# Altium PCB DUTBoard_DEFAULT.PcbDoc (part 2 of 2)
Units mil, origin at the board's own origin, x right, y up, seen from the top; angles counter-clockwise.
Board outline 5475 x 5475 mil, 4 copper layers (Top Layer, Mid-Layer 1, Mid-Layer 2, Bottom Layer); 89 components, 471 nets, 1705 pads, 264 vias.
Unrouted connection lines stored in the file: 818.
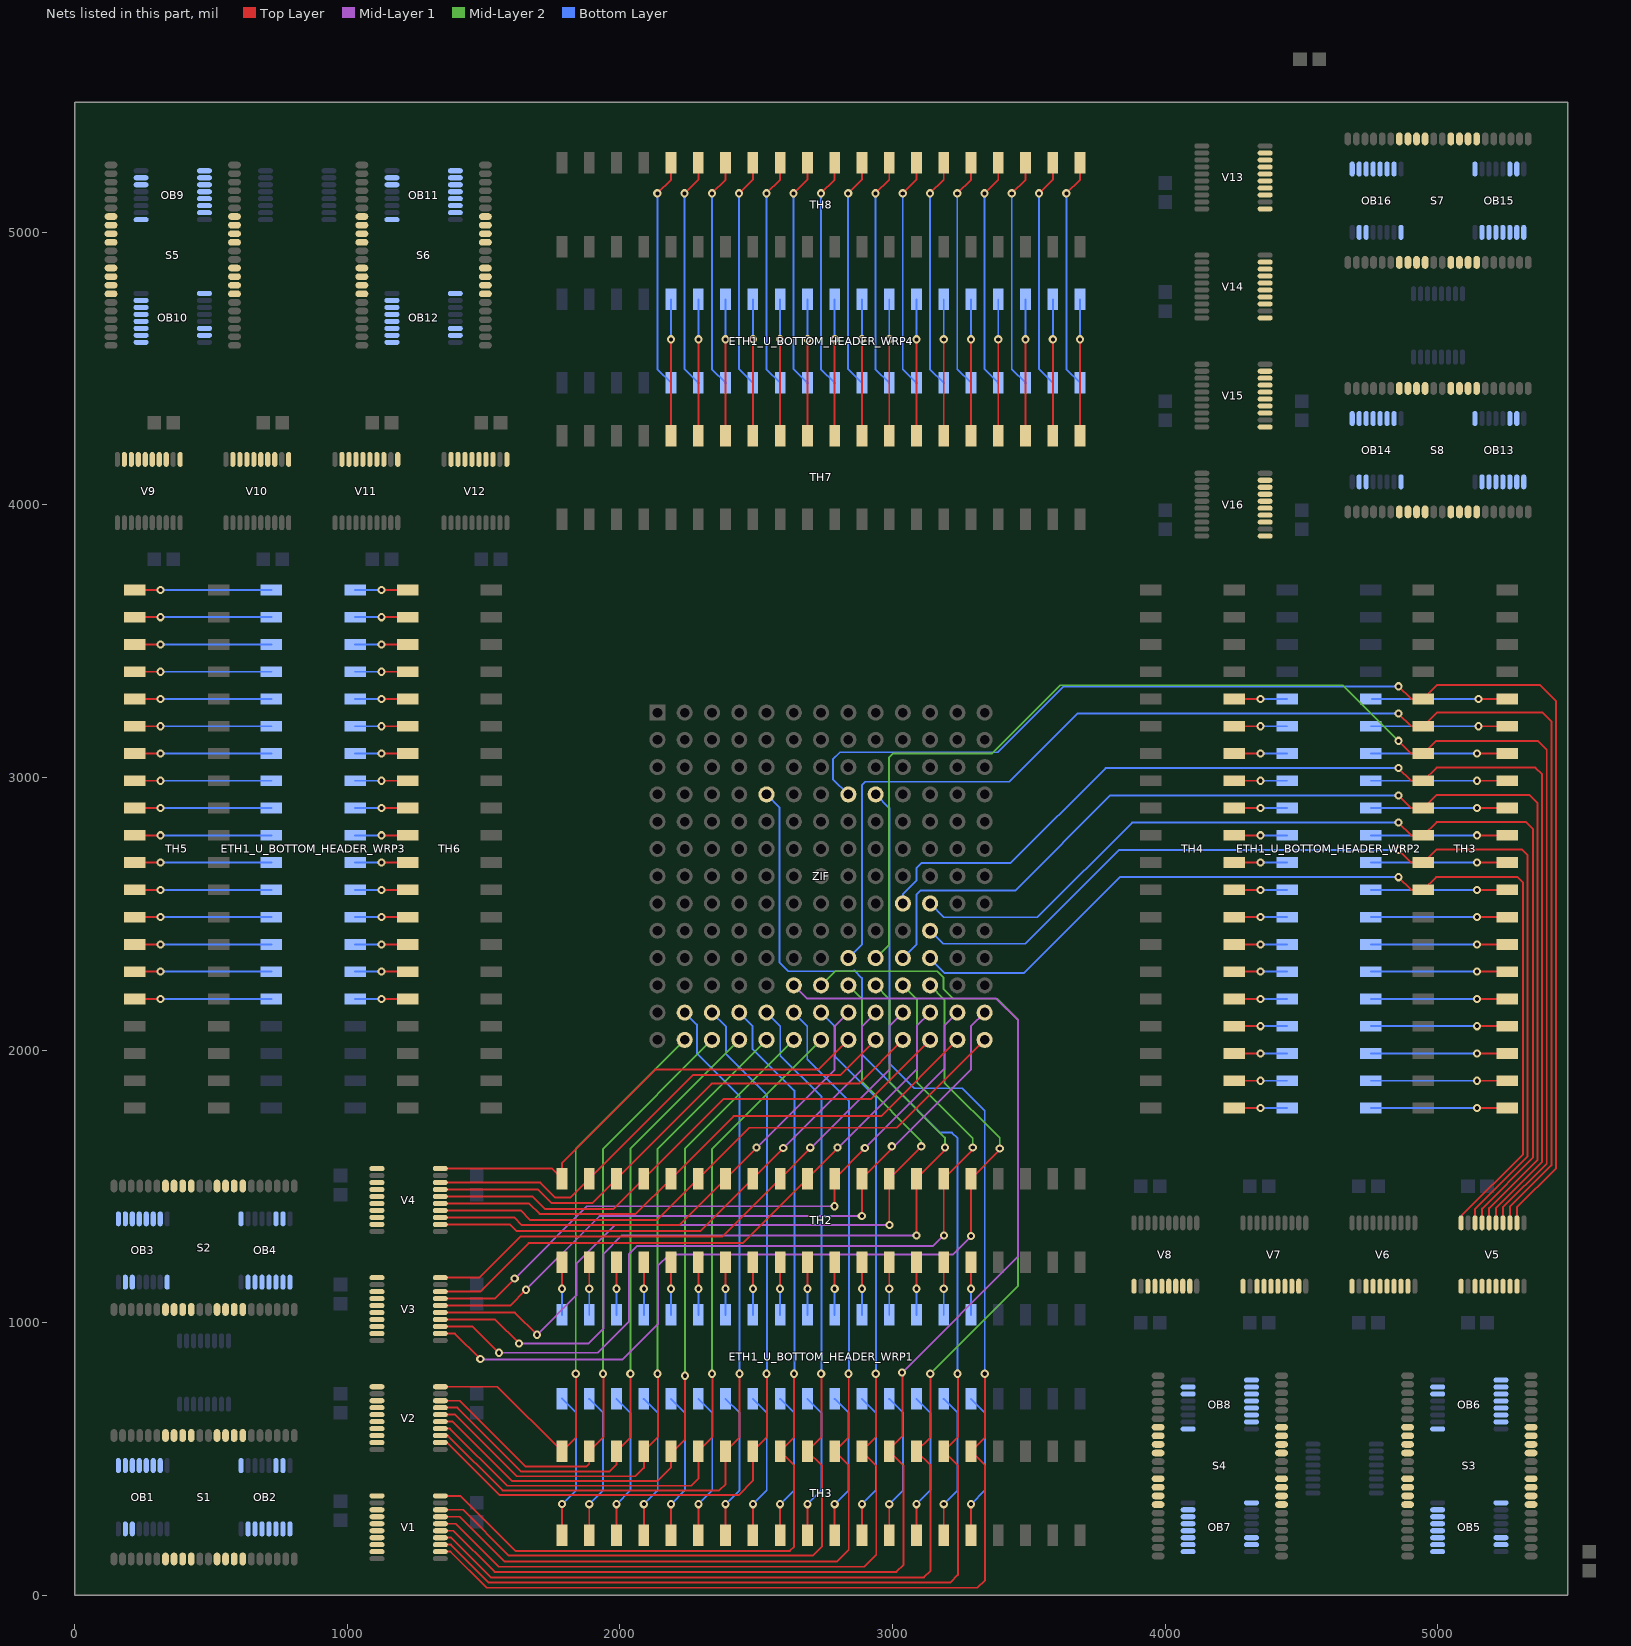
[diagram p4: the nets of this part, all layers, seen from the top]

## Via types
v1: diameter 30, hole 15, Top Layer to Bottom Layer, 264 vias

## Nets (pads, with @x,y where several pads share a name; then routed paths per layer and width w, separated by ;. In a path a pad name is that pad's centre, name@x,y a point inside that pad or via, vN(x,y) a via of type N, cw(c..) or ccw(c..) an arc to the next point about the centre after c; other vN are vias at no path point) (continued)
INSIDE_B88: TH3.32@4946.46,2587.5 V5.IVCC0 ZIF.89 | length 3732.4
  Top Layer w7: v1(4855,2634) 4901.5,2587.5 TH3.32@4946.46,2587.5 4992.96,2634 5292,2634 5312,2614 5312,1618.23 5087.58,1393.82 5087.58,1368.88 V5.IVCC0@5084.84,1366.14
  Bottom Layer w7: ZIF.89@3137.5,2337.5 3137.5,2335.5 3190,2283 3482,2283 3833,2634 v1(4855,2634)
INSIDE_B89: TH3.31@4946.46,2687.5 V5.IVCC1 ZIF.90 | length 3830.5
  Top Layer w7: v1(4855,2734) 4901.5,2687.5 TH3.31@4946.46,2687.5 4994.96,2736 5308,2736 5329,2715 5329,1610.08 5136.02,1417.11 V5.IVCC1@5136.02,1366.14
  Bottom Layer w7: ZIF.90@3137.5,2437.5 3185,2390 3487,2390 3831,2734 v1(4855,2734)
INSIDE_B90: TH3.30@4946.46,2787.5 V5.IVCC2 ZIF.91 | length 3946.9
  Top Layer w7: v1(4855,2834) 4901.5,2787.5 TH3.30@4946.46,2787.5 4994.96,2836 5323,2836 5348,2811 5348,1605.04 5161.61,1418.66 V5.IVCC2@5161.61,1366.14
  Bottom Layer w7: ZIF.91@3137.5,2537.5 3188,2487 3531,2487 3878,2834 v1(4855,2834)
INSIDE_B91: TH3.29@4946.46,2887.5 V5.IVCC3 ZIF.92 | length 4346.2
  Top Layer w7: v1(4855,2934) 4901.5,2887.5 TH3.29@4946.46,2887.5 4993.96,2935 5336,2935 5365,2906 5365,1598 5187.2,1420.2 V5.IVCC3@5187.2,1366.14
  Bottom Layer w7: ZIF.92@3037.5,2337.5 3087,2387 3087,2570 3102,2585 3450,2585 3799,2934 v1(4855,2934)
INSIDE_B92: TH3.28@4946.46,2987.5 V5.IVCC4 ZIF.93 | length 4361.7
  Top Layer w7: v1(4855,3034) 4901.5,2987.5 TH3.28@4946.46,2987.5 4994.96,3036 5357,3036 5382,3011 5382,1590.96 5212.8,1421.75 V5.IVCC4@5212.8,1366.14
  Bottom Layer w7: ZIF.93@3037.5,2537.5 3037.5,2571.5 3087,2621 3087,2667 3106,2686 3433,2686 3781,3034 v1(4855,3034)
INSIDE_B93: TH3.27@4946.46,3087.5 V5.IVCC5 ZIF.94 | length 5215.8
  Top Layer w7: v1(4855,3134) 4901.5,3087.5 TH3.27@4946.46,3087.5 4992.96,3134 5366,3134 5399,3101 5399,1583.92 5238.39,1423.3 V5.IVCC5@5238.39,1366.14
  Mid-Layer 2 w7: ZIF.94@2937.5,2337.5 2987,2387 2987,3073 3001,3087 3363,3087 3614,3338 4651,3338 v1(4855,3134)
INSIDE_B94: TH3.26@4946.46,3187.5 V5.IVCC6 ZIF.95 | length 5247.6
  Top Layer w7: v1(4855,3234) 4901.5,3187.5 TH3.26@4946.46,3187.5 4996.96,3238 5383,3238 5416,3205 5416,1576.88 5264,1424.88 V5.IVCC6@5264,1366.17
  Bottom Layer w7: ZIF.95@2837.5,2337.5 2887,2387 2887,2971 2900,2984 3427,2984 3677,3234 v1(4855,3234)
INSIDE_B95: TH3.25@4946.46,3287.5 V5.IVCC7 ZIF.96 | length 4952.6
  Top Layer w7: v1(4855,3334) 4901.5,3287.5 TH3.25@4946.46,3287.5 4997.96,3339 5373,3339 5433,3279 5433,1567 5289.57,1423.57 V5.IVCC7@5289.57,1366.14
  Bottom Layer w7: ZIF.96@2837.5,2937.5 2781,2994 2781,3066 2807,3092 3386,3092 3628,3334 v1(4855,3334)
INSIDE_B96: TH2.40 V4.IVCC0 ZIF.97 | length 1756.3
  Top Layer w7: V4.IVCC0@1341.14,1565.16 1750.89,1565.16 TH2.40@1787.5,1528.54 1787.5,1586.5 2129,1928 2728,1928 ZIF.97@2837.5,2037.5
INSIDE_B97: TH2.39 V4.IVCC1 ZIF.98 | length 1858.8
  Top Layer w7: V4.IVCC1@1341.14,1513.98 1708.02,1513.98 1763,1459 1817.96,1459 TH2.39@1887.5,1528.54 2266.96,1908 2808,1908 ZIF.98@2937.5,2037.5
INSIDE_B98: TH2.38 V4.IVCC2 ZIF.99 | length 1964.7
  Top Layer w7: V4.IVCC2@1341.14,1488.39 1699.61,1488.39 1749,1439 1897.96,1439 TH2.38@1987.5,1528.54 2335.96,1877 2877,1877 ZIF.99@3037.5,2037.5
INSIDE_B99: TH2.37 V4.IVCC3 ZIF.100 | length 2072.3
  Top Layer w7: V4.IVCC3@1341.14,1462.8 1680.2,1462.8 1726,1417 1975.96,1417 TH2.37@2087.5,1528.54 2379.96,1821 2921,1821 ZIF.100@3137.5,2037.5
INSIDE_B100: TH2.36 V4.IVCC4 ZIF.101 | length 2176.7
  Top Layer w7: V4.IVCC4@1341.14,1437.2 1666.8,1437.2 1705,1399 2057.96,1399 TH2.36@2187.5,1528.54 2416.96,1758 2958,1758 ZIF.101@3237.5,2037.5
INSIDE_B101: TH2.35 V4.IVCC5 ZIF.102 | length 2284.3
  Top Layer w7: V4.IVCC5@1341.14,1411.61 1635.39,1411.61 1670,1377 2135.96,1377 TH2.35@2287.5,1528.54 2473.96,1715 3015,1715 ZIF.102@3337.5,2037.5
INSIDE_B102: TH2.34 V4.IVCC6 ZIF.103 | length 1927
  Top Layer w7: V4.IVCC6@1341.14,1386.02 1611.98,1386.02 1640,1358 2216.96,1358 TH2.34@2387.5,1528.54 v1(2501,1642.04) v1@2504.04,1642.04
  Mid-Layer 1 w7: v1(2501,1642.04) 2787,1928.04 2787,2087 ZIF.103@2837.5,2137.5
INSIDE_B103: TH2.33 V4.IVCC7 ZIF.104 | length 2032.1
  Top Layer w7: V4.IVCC7@1341.14,1360.43 1596.57,1360.43 1621,1336 2294.96,1336 TH2.33@2487.5,1528.54 2599,1640.04 v1(2599,1641)
  Mid-Layer 1 w7: v1(2599,1641) 2599.96,1641 2888,1929.04 2888,2088 ZIF.104@2937.5,2137.5
INSIDE_B104: TH2.32 V3.IVCC0 ZIF.105 | length 2194
  Top Layer w7: V3.IVCC0@1341.14,1165.16 1484.16,1165.16 1635,1316 2374.96,1316 TH2.32@2587.5,1528.54 2698,1639.04 v1(2698,1642)
  Mid-Layer 1 w7: v1(2698,1642) 2700.96,1642 2989,1930.04 2989,2089 ZIF.105@3037.5,2137.5
INSIDE_B105: TH2.31 V3.IVCC1 ZIF.106 | length 2315.7
  Top Layer w7: V3.IVCC1@1341.14,1113.98 1486.98,1113.98 1665,1292 2450.96,1292 TH2.31@2687.5,1528.54 2798,1639.04 v1(2798,1643)
  Mid-Layer 1 w7: v1(2798,1643) 2801.96,1643 3089,1930.04 3089,2089 ZIF.106@3137.5,2137.5
INSIDE_B106: TH2.30 V3.IVCC2 ZIF.107 | length 2483.7
  Top Layer w7: V3.IVCC2@1341.14,1088.39 1540.39,1088.39 v1(1614,1162) ; v1@2787.5,1427.5 TH2.30@2787.5,1528.54 2898,1639.04 v1(2898,1641)
  Mid-Layer 1 w7: v1(1614,1162) 1879,1427 v1(2787,1427) ; v1(2898,1641) 2899.96,1641 3190,1931.04 3190,2090 ZIF.107@3237.5,2137.5
INSIDE_B107: TH2.29 V3.IVCC3 ZIF.108 | length 2620.2
  Top Layer w7: V3.IVCC3@1341.14,1062.8 1596.8,1062.8 v1(1655,1121) ; v1(2887,1391) 2887.5,1391.5 TH2.29@2887.5,1528.54 2997,1638.04 v1(2997,1647)
  Mid-Layer 1 w7: v1(1655,1121) 1925,1391 v1(2887,1391) ; v1(2997,1647) 3005.96,1647 3287,1928.04 3287,2087 ZIF.108@3337.5,2137.5
INSIDE_B108: TH2.28 V3.IVCC4 ZIF.109 | length 2954.7
  Top Layer w7: V3.IVCC4@1341.14,1037.2 1614.8,1037.2 v1(1696,956) ; v1(2988,1358) 2987.5,1358.5 TH2.28@2987.5,1528.54 3105,1646.04 v1(3105,1647)
  Mid-Layer 1 w7: v1(1696,956) 1840,1100 1840,1217 1981,1358 v1(2988,1358)
  Mid-Layer 2 w7: ZIF.109@2837.5,2237.5 2888,2187 2888,1882.96 3105,1665.96 v1(3105,1647)
INSIDE_B109: TH2.27 V3.IVCC5 ZIF.110 | length 3174.1
  Top Layer w7: V3.IVCC5@1341.14,1011.61 1542.39,1011.61 v1(1630,924) ; v1(3088,1320) 3087.5,1320.5 TH2.27@3087.5,1528.54 3192,1633.04 v1(3192,1643)
  Mid-Layer 1 w7: v1(1630,924) 1885,924 1939,978 1939,1252 2007,1320 v1(3088,1320)
  Mid-Layer 2 w7: ZIF.110@2937.5,2237.5 2988,2187 2988,1882.96 3192,1678.96 v1(3192,1643)
INSIDE_B110: TH2.26 V3.IVCC6 ZIF.111 | length 3277.8
  Top Layer w7: V3.IVCC6@1341.14,986.02 1459.98,986.02 v1(1556,890) ; v1(3188,1320) 3187.5,1320.5 TH2.26@3187.5,1528.54 3294,1635.04 v1(3294,1643)
  Mid-Layer 1 w7: v1(1556,890) 1919,890 2033,1004 2033,1252 2063,1282 3149,1282 v1@3187.5,1320.5
  Mid-Layer 2 w7: ZIF.111@3037.5,2237.5 3089,2186 3089,1881.96 3294,1676.96 v1(3294,1643)
INSIDE_B111: TH2.25 V3.IVCC7 ZIF.112 | length 3368.2
  Top Layer w7: V3.IVCC7@1341.14,960.43 1394.57,960.43 v1(1488,867) ; v1(3288,1318) 3287.5,1318.5 TH2.25@3287.5,1528.54 3393,1634.04 v1(3393,1639.02)
  Mid-Layer 1 w7: v1(1488,867) 1489.5,865.5 2009.5,865.5 2139,995 2139,1209 2180,1250 3220,1250 v1(3288,1318)
  Mid-Layer 2 w7: ZIF.112@3137.5,2237.5 3190,2185 3190,1880.96 3393,1677.96 v1(3393,1639.02)
INSIDE_B112: TH3.40@1787.5,528.54 V2.IVCC0 ZIF.113 | length 2241.1
  Top Layer w7: V2.IVCC0@1341.14,765.16 1550.89,765.16 TH3.40@1787.5,528.54 1839,580.04 v1@1839,814
  Mid-Layer 2 w7: v1(1838,813) 1838,1638 ZIF.113@2237.5,2037.5
INSIDE_B113: TH3.39@1887.5,528.54 V2.IVCC1 ZIF.114 | length 2393.2
  Top Layer w7: V2.IVCC1@1341.14,713.98 1412.02,713.98 1654,472 1876,472 1887.5,483.5 TH3.39@1887.5,528.54 1939,580.04 v1@1939,814
  Mid-Layer 2 w7: v1(1938,813) 1938,1638 ZIF.114@2337.5,2037.5
INSIDE_B114: TH3.38@1987.5,528.54 V2.IVCC2 ZIF.115 | length 2498.4
  Top Layer w7: V2.IVCC2@1341.14,688.39 1403.61,688.39 1637,455 1962,455 1987.5,480.5 TH3.38@1987.5,528.54 2039,580.04 v1@2039,814
  Mid-Layer 2 w7: v1(2038,813) 2038,1638 ZIF.115@2437.5,2037.5
INSIDE_B115: TH3.37@2087.5,528.54 V2.IVCC3 ZIF.116 | length 2610.3
  Top Layer w7: V2.IVCC3@1341.14,662.8 1395.2,662.8 1621,437 2057,437 2087.5,467.5 TH3.37@2087.5,528.54 2139,580.04 v1@2139,814
  Mid-Layer 2 w7: v1(2138,813) 2138,1638 ZIF.116@2537.5,2037.5
INSIDE_B116: TH3.36@2187.5,528.54 V2.IVCC4 ZIF.117 | length 2720.4
  Top Layer w7: V2.IVCC4@1341.14,637.2 1386.8,637.2 1605,419 2136,419 2187.5,470.5 TH3.36@2187.5,528.54 ; TH3.36@2187.5,521 2239,572.5 v1@2239,806.46
  Mid-Layer 2 w7: v1(2238,805.46) 2238,1638 ZIF.117@2637.5,2037.5
INSIDE_B117: TH3.35@2287.5,528.54 V2.IVCC5 ZIF.118 | length 2841
  Top Layer w7: V2.IVCC5@1341.14,611.61 1376.39,611.61 1586,402 2261,402 2287.5,428.5 TH3.35@2287.5,528.54 2339,580.04 v1@2339,814
  Mid-Layer 2 w7: v1(2338,813) 2338,1638 ZIF.118@2737.5,2037.5
INSIDE_B118: TH3.34@2387.5,528.54 V2.IVCC6 ZIF.119 | length 2973.7
  Top Layer w7: V2.IVCC6@1341.14,586.02 1368.98,586.02 1570,385 2364,385 2387.5,408.5 TH3.34@2387.5,528.54 2439,580.04 v1@2439,814
  Bottom Layer w7: ZIF.119@2237.5,2137.5 2282,2093 2282,1988 2438,1832 v1(2438,813)
INSIDE_B119: TH3.33@2487.5,528.54 V2.IVCC7 ZIF.120 | length 3071.4
  Top Layer w7: V2.IVCC7@1341.14,560.43 1366.57,560.43 1559,368 2435,368 2487.5,420.5 TH3.33@2487.5,528.54 2539,580.04 v1@2539,814
  Bottom Layer w7: ZIF.120@2337.5,2137.5 2389,2086 2389,1985 2539.46,1834.54 2539.46,814.46 v1(2538,813)
INSIDE_B120: TH3.32@2587.5,528.54 V1.IVCC0 ZIF.121 | length 3474.6
  Top Layer w7: V1.IVCC0@1341.14,365.16 1413.84,365.16 1616,163 2623,163 2639,179 2639,477.04 TH3.32@2587.5,528.54 2639,580.04 v1@2639,814
  Bottom Layer w7: ZIF.121@2437.5,2137.5 2486,2089 2486,2005 2639.46,1851.54 2639.46,814.46 v1(2638,813)
INSIDE_B121: TH3.31@2687.5,528.54 V1.IVCC1 ZIF.122 | length 3569.8
  Top Layer w7: V1.IVCC1@1341.14,313.98 1425.02,313.98 1593,146 2707,146 2741,180 2741,475.04 TH3.31@2687.5,528.54 2739,580.04 v1@2739,814
  Bottom Layer w7: ZIF.122@2537.5,2137.5 2588,2087 2588,1980 2739.46,1828.54 2739.46,814.46 v1(2738,813)
INSIDE_B122: TH3.30@2787.5,528.54 V1.IVCC2 ZIF.123 | length 3681.6
  Top Layer w7: V1.IVCC2@1341.14,288.39 1412.61,288.39 1577,124 2795,124 2839,168 2839,477.04 TH3.30@2787.5,528.54 2839,580.04 v1@2839,814
  Bottom Layer w7: ZIF.123@2637.5,2137.5 2687,2088 2687,1966 2839.46,1813.54 2839.46,814.46 v1(2838,813)
INSIDE_B123: TH3.29@2887.5,528.54 V1.IVCC3 ZIF.124 | length 3799.3
  Top Layer w7: V1.IVCC3@1341.14,262.8 1397.2,262.8 1555,105 2896,105 2940,149 2940,476.04 TH3.29@2887.5,528.54 2939,580.04 v1@2939,814
  Bottom Layer w7: ZIF.124@2737.5,2137.5 2789,2086 2789,1976 2939.46,1825.54 2939.46,814.46 v1(2938,813)
INSIDE_B124: TH3.28@2987.5,528.54 V1.IVCC4 ZIF.125 | length 4860.9
  Top Layer w7: V1.IVCC4@1341.14,237.2 1388.8,237.2 1540,86 3014,86 3040,112 3040,476.04 TH3.28@2987.5,528.54 ; TH3.28@2984,533 3035.5,584.5 v1@3035.5,818.46
  Mid-Layer 1 w7: ZIF.125@2637.5,2237.5 2686,2189 3380,2189 3460,2109 3460,1242.96 v1(3034.5,817.46)
INSIDE_B125: TH3.27@3087.5,528.54 V1.IVCC5 ZIF.126 | length 4908.9
  Top Layer w7: V1.IVCC5@1341.14,211.61 1381.39,211.61 1527,66 3115,66 3139,90 3139,477.04 TH3.27@3087.5,528.54 3139,580.04 v1@3139,814
  Mid-Layer 2 w7: ZIF.126@2737.5,2237.5 2789,2289 3164,2289 3186,2267 3186,2224 3222,2188 3383,2188 3460,2111 3460,1135 v1(3138,813)
INSIDE_B126: TH3.26@3187.5,528.54 V1.IVCC6 ZIF.127 | length 5334
  Top Layer w7: V1.IVCC6@1341.14,186.02 1379.98,186.02 1519,47 3211,47 3239,75 3239,477.04 TH3.26@3187.5,528.54 3239,580.04 v1@3239,814
  Bottom Layer w7: ZIF.127@2537.5,2937.5 2585,2890 2585,2322 2618,2289 2856,2289 2859,2292 2887,2264 2887,1984 3174,1697 3217,1697 3238,1676 v1(3238,813)
INSIDE_B127: TH3.25@3287.5,528.54 V1.IVCC7 ZIF.128 | length 5258.5
  Top Layer w7: V1.IVCC7@1341.14,160.43 1378.57,160.43 1511,28 3311,28 3339,56 3339,477.04 TH3.25@3287.5,528.54 3339,580.04 v1@3339,814
  Bottom Layer w7: ZIF.128@2937.5,2937.5 2988,2887 2988,1951 3079,1860 3255,1860 3338,1777 v1(3338,813)
NetOB1_U_OB_WRP16_DS: OB16.DS
OB_D_B0: OB16.D0 S7.DATA0 V14.OVL0
OB_D_B1: OB16.D1 S7.DATA1 V14.OVL1
OB_D_B2: OB16.D2 S7.DATA2 V14.OVL2
OB_D_B3: OB16.D3 S7.DATA3 V14.OVL3
OB_D_B4: OB16.D4 S7.DATA4 V14.OVL4
OB_D_B5: OB16.D5 S7.DATA5 V14.OVL5
OB_D_B6: OB16.D6 S7.DATA6 V14.OVL6
OB_D_B7: OB16.D7 S7.DATA7 V14.OVL7
OB_D_B8: OB15.D0 S7.DATA8 V13.OVL0
OB_D_B9: OB15.D1 S7.DATA9 V13.OVL1
OB_D_B10: OB15.D2 S7.DATA10 V13.OVL2
OB_D_B11: OB15.D3 S7.DATA11 V13.OVL3
OB_D_B12: OB15.D4 S7.DATA12 V13.OVL4
OB_D_B13: OB15.D5 S7.DATA13 V13.OVL5
OB_D_B14: OB15.D6 S7.DATA14 V13.OVL6
OB_D_B15: OB15.D7 S7.DATA15 V13.OVL7
OB_D_B16: OB14.D0 S8.DATA0 V16.OVL0
OB_D_B17: OB14.D1 S8.DATA1 V16.OVL1
OB_D_B18: OB14.D2 S8.DATA2 V16.OVL2
OB_D_B19: OB14.D3 S8.DATA3 V16.OVL3
OB_D_B20: OB14.D4 S8.DATA4 V16.OVL4
OB_D_B21: OB14.D5 S8.DATA5 V16.OVL5
OB_D_B22: OB14.D6 S8.DATA6 V16.OVL6
OB_D_B23: OB14.D7 S8.DATA7 V16.OVL7
OB_D_B24: OB13.D0 S8.DATA8 V15.OVL0
OB_D_B25: OB13.D1 S8.DATA9 V15.OVL1
OB_D_B26: OB13.D2 S8.DATA10 V15.OVL2
OB_D_B27: OB13.D3 S8.DATA11 V15.OVL3
OB_D_B28: OB13.D4 S8.DATA12 V15.OVL4
OB_D_B29: OB13.D5 S8.DATA13 V15.OVL5
OB_D_B30: OB13.D6 S8.DATA14 V15.OVL6
OB_D_B31: OB13.D7 S8.DATA15 V15.OVL7
OB_D_B32: OB12.D0 S6.DATA0 V12.OVL0
OB_D_B33: OB12.D1 S6.DATA1 V12.OVL1
OB_D_B34: OB12.D2 S6.DATA2 V12.OVL2
OB_D_B35: OB12.D3 S6.DATA3 V12.OVL3
OB_D_B36: OB12.D4 S6.DATA4 V12.OVL4
OB_D_B37: OB12.D5 S6.DATA5 V12.OVL5
OB_D_B38: OB12.D6 S6.DATA6 V12.OVL6
OB_D_B39: OB12.D7 S6.DATA7 V12.OVL7
OB_D_B40: OB11.D0 S6.DATA8 V11.OVL0
OB_D_B41: OB11.D1 S6.DATA9 V11.OVL1
OB_D_B42: OB11.D2 S6.DATA10 V11.OVL2
OB_D_B43: OB11.D3 S6.DATA11 V11.OVL3
OB_D_B44: OB11.D4 S6.DATA12 V11.OVL4
OB_D_B45: OB11.D5 S6.DATA13 V11.OVL5
OB_D_B46: OB11.D6 S6.DATA14 V11.OVL6
OB_D_B47: OB11.D7 S6.DATA15 V11.OVL7
OB_D_B48: OB10.D0 S5.DATA0 V10.OVL0
OB_D_B49: OB10.D1 S5.DATA1 V10.OVL1
OB_D_B50: OB10.D2 S5.DATA2 V10.OVL2
OB_D_B51: OB10.D3 S5.DATA3 V10.OVL3
OB_D_B52: OB10.D4 S5.DATA4 V10.OVL4
OB_D_B53: OB10.D5 S5.DATA5 V10.OVL5
OB_D_B54: OB10.D6 S5.DATA6 V10.OVL6
OB_D_B55: OB10.D7 S5.DATA7 V10.OVL7
OB_D_B56: OB9.D0 S5.DATA8 V9.OVL0
OB_D_B57: OB9.D1 S5.DATA9 V9.OVL1
OB_D_B58: OB9.D2 S5.DATA10 V9.OVL2
OB_D_B59: OB9.D3 S5.DATA11 V9.OVL3
OB_D_B60: OB9.D4 S5.DATA12 V9.OVL4
OB_D_B61: OB9.D5 S5.DATA13 V9.OVL5
OB_D_B62: OB9.D6 S5.DATA14 V9.OVL6
OB_D_B63: OB9.D7 S5.DATA15 V9.OVL7
OB_D_B64: OB8.D0 S4.DATA0 V8.OVL0
OB_D_B65: OB8.D1 S4.DATA1 V8.OVL1
OB_D_B66: OB8.D2 S4.DATA2 V8.OVL2
OB_D_B67: OB8.D3 S4.DATA3 V8.OVL3
OB_D_B68: OB8.D4 S4.DATA4 V8.OVL4
OB_D_B69: OB8.D5 S4.DATA5 V8.OVL5
OB_D_B70: OB8.D6 S4.DATA6 V8.OVL6
OB_D_B71: OB8.D7 S4.DATA7 V8.OVL7
OB_D_B72: OB7.D0 S4.DATA8 V7.OVL0
OB_D_B73: OB7.D1 S4.DATA9 V7.OVL1
OB_D_B74: OB7.D2 S4.DATA10 V7.OVL2
OB_D_B75: OB7.D3 S4.DATA11 V7.OVL3
OB_D_B76: OB7.D4 S4.DATA12 V7.OVL4
OB_D_B77: OB7.D5 S4.DATA13 V7.OVL5
OB_D_B78: OB7.D6 S4.DATA14 V7.OVL6
OB_D_B79: OB7.D7 S4.DATA15 V7.OVL7
OB_D_B80: OB6.D0 S3.DATA0 V6.OVL0
OB_D_B81: OB6.D1 S3.DATA1 V6.OVL1
OB_D_B82: OB6.D2 S3.DATA2 V6.OVL2
OB_D_B83: OB6.D3 S3.DATA3 V6.OVL3
OB_D_B84: OB6.D4 S3.DATA4 V6.OVL4
OB_D_B85: OB6.D5 S3.DATA5 V6.OVL5
OB_D_B86: OB6.D6 S3.DATA6 V6.OVL6
OB_D_B87: OB6.D7 S3.DATA7 V6.OVL7
OB_D_B88: OB5.D0 S3.DATA8 V5.OVL0
OB_D_B89: OB5.D1 S3.DATA9 V5.OVL1
OB_D_B90: OB5.D2 S3.DATA10 V5.OVL2
OB_D_B91: OB5.D3 S3.DATA11 V5.OVL3
OB_D_B92: OB5.D4 S3.DATA12 V5.OVL4
OB_D_B93: OB5.D5 S3.DATA13 V5.OVL5
OB_D_B94: OB5.D6 S3.DATA14 V5.OVL6
OB_D_B95: OB5.D7 S3.DATA15 V5.OVL7
OB_D_B96: OB4.D0 S2.DATA0 V4.OVL0
OB_D_B97: OB4.D1 S2.DATA1 V4.OVL1
OB_D_B98: OB4.D2 S2.DATA2 V4.OVL2
OB_D_B99: OB4.D3 S2.DATA3 V4.OVL3
OB_D_B100: OB4.D4 S2.DATA4 V4.OVL4
OB_D_B101: OB4.D5 S2.DATA5 V4.OVL5
OB_D_B102: OB4.D6 S2.DATA6 V4.OVL6
OB_D_B103: OB4.D7 S2.DATA7 V4.OVL7
OB_D_B104: OB3.D0 S2.DATA8 V3.OVL0
OB_D_B105: OB3.D1 S2.DATA9 V3.OVL1
OB_D_B106: OB3.D2 S2.DATA10 V3.OVL2
OB_D_B107: OB3.D3 S2.DATA11 V3.OVL3
OB_D_B108: OB3.D4 S2.DATA12 V3.OVL4
OB_D_B109: OB3.D5 S2.DATA13 V3.OVL5
OB_D_B110: OB3.D6 S2.DATA14 V3.OVL6
OB_D_B111: OB3.D7 S2.DATA15 V3.OVL7
OB_D_B112: OB2.D0 S1.DATA0 V2.OVL0
OB_D_B113: OB2.D1 S1.DATA1 V2.OVL1
OB_D_B114: OB2.D2 S1.DATA2 V2.OVL2
OB_D_B115: OB2.D3 S1.DATA3 V2.OVL3
OB_D_B116: OB2.D4 S1.DATA4 V2.OVL4
OB_D_B117: OB2.D5 S1.DATA5 V2.OVL5
OB_D_B118: OB2.D6 S1.DATA6 V2.OVL6
OB_D_B119: OB2.D7 S1.DATA7 V2.OVL7
OB_D_B120: OB1.D0 S1.DATA8 V1.OVL0
OB_D_B121: OB1.D1 S1.DATA9 V1.OVL1
OB_D_B122: OB1.D2 S1.DATA10 V1.OVL2
OB_D_B123: OB1.D3 S1.DATA11 V1.OVL3
OB_D_B124: OB1.D4 S1.DATA12 V1.OVL4
OB_D_B125: OB1.D5 S1.DATA13 V1.OVL5
OB_D_B126: OB1.D6 S1.DATA14 V1.OVL6
OB_D_B127: OB1.D7 S1.DATA15 V1.OVL7
OUTSIDE_L_W0_U_BOTTOM_HEADER_WRP1: ETH1_U_BOTTOM_HEADER_WRP1.1 TH2.1 | length 192.9
  Top Layer w7: v1(1787.5,1124.5) TH2.1@1787.5,1221.46
  Bottom Layer w7: ETH1_U_BOTTOM_HEADER_WRP1.1@1787.5,1028.54 v1(1787.5,1124.5)
OUTSIDE_L_W0_U_BOTTOM_HEADER_WRP2: ETH1_U_BOTTOM_HEADER_WRP2.1 TH4.1 | length 192.9
  Top Layer w7: TH4.1@4253.54,1787.5 v1(4349.5,1787.5)
  Bottom Layer w7: v1(4349.5,1787.5) ETH1_U_BOTTOM_HEADER_WRP2.1@4446.46,1787.5
OUTSIDE_L_W0_U_BOTTOM_HEADER_WRP3: ETH1_U_BOTTOM_HEADER_WRP3.1 TH6.1 | length 193.6
  Top Layer w7: v1@1125,3688 v1(1125.5,3687.5) TH6.1@1221.46,3687.5
  Bottom Layer w7: ETH1_U_BOTTOM_HEADER_WRP3.1@1028.54,3687.5 v1(1125.5,3687.5)
OUTSIDE_L_W0_U_BOTTOM_HEADER_WRP4: ETH1_U_BOTTOM_HEADER_WRP4.1 TH8.1 | length 848.9
  Top Layer w7: v1(3637,5142) 3687.5,5192.5 TH8.1@3687.5,5253.54
  Bottom Layer w7: v1(3637,5142) 3637,4496.96 ETH1_U_BOTTOM_HEADER_WRP4.1@3687.5,4446.46
OUTSIDE_L_W1_U_BOTTOM_HEADER_WRP1: ETH1_U_BOTTOM_HEADER_WRP1.2 TH2.2 | length 192.9
  Top Layer w7: v1(1887.5,1124.5) TH2.2@1887.5,1221.46
  Bottom Layer w7: ETH1_U_BOTTOM_HEADER_WRP1.2@1887.5,1028.54 v1(1887.5,1124.5)
OUTSIDE_L_W1_U_BOTTOM_HEADER_WRP2: ETH1_U_BOTTOM_HEADER_WRP2.2 TH4.2 | length 192.9
  Top Layer w7: TH4.2@4253.54,1887.5 v1(4349.5,1887.5)
  Bottom Layer w7: v1(4349.5,1887.5) ETH1_U_BOTTOM_HEADER_WRP2.2@4446.46,1887.5
OUTSIDE_L_W1_U_BOTTOM_HEADER_WRP3: ETH1_U_BOTTOM_HEADER_WRP3.2 TH6.2 | length 192.9
  Top Layer w7: v1(1125.5,3587.5) TH6.2@1221.46,3587.5
  Bottom Layer w7: ETH1_U_BOTTOM_HEADER_WRP3.2@1028.54,3587.5 v1(1125.5,3587.5)
OUTSIDE_L_W1_U_BOTTOM_HEADER_WRP4: ETH1_U_BOTTOM_HEADER_WRP4.2 TH8.2 | length 848.9
  Top Layer w7: v1(3537,5142) 3587.5,5192.5 TH8.2@3587.5,5253.54
  Bottom Layer w7: v1(3537,5142) 3537,4496.96 ETH1_U_BOTTOM_HEADER_WRP4.2@3587.5,4446.46
OUTSIDE_L_W2_U_BOTTOM_HEADER_WRP1: ETH1_U_BOTTOM_HEADER_WRP1.3 TH2.3 | length 192.9
  Top Layer w7: v1(1987.5,1124.5) TH2.3@1987.5,1221.46
  Bottom Layer w7: ETH1_U_BOTTOM_HEADER_WRP1.3@1987.5,1028.54 v1(1987.5,1124.5)
OUTSIDE_L_W2_U_BOTTOM_HEADER_WRP2: ETH1_U_BOTTOM_HEADER_WRP2.3 TH4.3 | length 192.9
  Top Layer w7: TH4.3@4253.54,1987.5 v1(4349.5,1987.5)
  Bottom Layer w7: v1(4349.5,1987.5) ETH1_U_BOTTOM_HEADER_WRP2.3@4446.46,1987.5
OUTSIDE_L_W2_U_BOTTOM_HEADER_WRP3: ETH1_U_BOTTOM_HEADER_WRP3.3 TH6.3 | length 192.9
  Top Layer w7: v1(1125.5,3487.5) TH6.3@1221.46,3487.5
  Bottom Layer w7: ETH1_U_BOTTOM_HEADER_WRP3.3@1028.54,3487.5 v1(1125.5,3487.5)
OUTSIDE_L_W2_U_BOTTOM_HEADER_WRP4: ETH1_U_BOTTOM_HEADER_WRP4.3 TH8.3 | length 848.9
  Top Layer w7: v1(3437,5142) 3487.5,5192.5 TH8.3@3487.5,5253.54
  Bottom Layer w7: v1(3437,5142) 3437,4496.96 ETH1_U_BOTTOM_HEADER_WRP4.3@3487.5,4446.46
OUTSIDE_L_W3_U_BOTTOM_HEADER_WRP1: ETH1_U_BOTTOM_HEADER_WRP1.4 TH2.4 | length 192.9
  Top Layer w7: v1(2087.5,1124.5) TH2.4@2087.5,1221.46
  Bottom Layer w7: ETH1_U_BOTTOM_HEADER_WRP1.4@2087.5,1028.54 v1(2087.5,1124.5)
OUTSIDE_L_W3_U_BOTTOM_HEADER_WRP2: ETH1_U_BOTTOM_HEADER_WRP2.4 TH4.4 | length 192.9
  Top Layer w7: TH4.4@4253.54,2087.5 v1(4349.5,2087.5)
  Bottom Layer w7: v1(4349.5,2087.5) ETH1_U_BOTTOM_HEADER_WRP2.4@4446.46,2087.5
OUTSIDE_L_W3_U_BOTTOM_HEADER_WRP3: ETH1_U_BOTTOM_HEADER_WRP3.4 TH6.4 | length 192.9
  Top Layer w7: v1(1125.5,3387.5) TH6.4@1221.46,3387.5
  Bottom Layer w7: ETH1_U_BOTTOM_HEADER_WRP3.4@1028.54,3387.5 v1(1125.5,3387.5)
OUTSIDE_L_W3_U_BOTTOM_HEADER_WRP4: ETH1_U_BOTTOM_HEADER_WRP4.4 TH8.4 | length 848.9
  Top Layer w7: v1(3337,5142) 3387.5,5192.5 TH8.4@3387.5,5253.54
  Bottom Layer w7: v1(3337,5142) 3337,4496.96 ETH1_U_BOTTOM_HEADER_WRP4.4@3387.5,4446.46
OUTSIDE_L_W4_U_BOTTOM_HEADER_WRP1: ETH1_U_BOTTOM_HEADER_WRP1.5 TH2.5 | length 192.9
  Top Layer w7: v1(2187.5,1124.5) TH2.5@2187.5,1221.46
  Bottom Layer w7: ETH1_U_BOTTOM_HEADER_WRP1.5@2187.5,1028.54 v1(2187.5,1124.5)
OUTSIDE_L_W4_U_BOTTOM_HEADER_WRP2: ETH1_U_BOTTOM_HEADER_WRP2.5 TH4.5 | length 192.9
  Top Layer w7: TH4.5@4253.54,2187.5 v1(4349.5,2187.5)
  Bottom Layer w7: v1(4349.5,2187.5) ETH1_U_BOTTOM_HEADER_WRP2.5@4446.46,2187.5
OUTSIDE_L_W4_U_BOTTOM_HEADER_WRP3: ETH1_U_BOTTOM_HEADER_WRP3.5 TH6.5 | length 192.9
  Top Layer w7: v1(1125.5,3287.5) TH6.5@1221.46,3287.5
  Bottom Layer w7: ETH1_U_BOTTOM_HEADER_WRP3.5@1028.54,3287.5 v1(1125.5,3287.5)
OUTSIDE_L_W4_U_BOTTOM_HEADER_WRP4: ETH1_U_BOTTOM_HEADER_WRP4.5 TH8.5 | length 848.9
  Top Layer w7: v1(3237,5142) 3287.5,5192.5 TH8.5@3287.5,5253.54
  Bottom Layer w7: v1(3237,5142) 3237,4496.96 ETH1_U_BOTTOM_HEADER_WRP4.5@3287.5,4446.46
OUTSIDE_L_W5_U_BOTTOM_HEADER_WRP1: ETH1_U_BOTTOM_HEADER_WRP1.6 TH2.6 | length 192.9
  Top Layer w7: v1(2287.5,1124.5) TH2.6@2287.5,1221.46
  Bottom Layer w7: ETH1_U_BOTTOM_HEADER_WRP1.6@2287.5,1028.54 v1(2287.5,1124.5)
OUTSIDE_L_W5_U_BOTTOM_HEADER_WRP2: ETH1_U_BOTTOM_HEADER_WRP2.6 TH4.6 | length 192.9
  Top Layer w7: TH4.6@4253.54,2287.5 v1(4349.5,2287.5)
  Bottom Layer w7: v1(4349.5,2287.5) ETH1_U_BOTTOM_HEADER_WRP2.6@4446.46,2287.5
OUTSIDE_L_W5_U_BOTTOM_HEADER_WRP3: ETH1_U_BOTTOM_HEADER_WRP3.6 TH6.6 | length 192.9
  Top Layer w7: v1(1125.5,3187.5) TH6.6@1221.46,3187.5
  Bottom Layer w7: ETH1_U_BOTTOM_HEADER_WRP3.6@1028.54,3187.5 v1(1125.5,3187.5)
OUTSIDE_L_W5_U_BOTTOM_HEADER_WRP4: ETH1_U_BOTTOM_HEADER_WRP4.6 TH8.6 | length 848.9
  Top Layer w7: v1(3137,5142) 3187.5,5192.5 TH8.6@3187.5,5253.54
  Bottom Layer w7: v1(3137,5142) 3137,4496.96 ETH1_U_BOTTOM_HEADER_WRP4.6@3187.5,4446.46
OUTSIDE_L_W6_U_BOTTOM_HEADER_WRP1: ETH1_U_BOTTOM_HEADER_WRP1.7 TH2.7 | length 192.9
  Top Layer w7: v1(2387.5,1124.5) TH2.7@2387.5,1221.46
  Bottom Layer w7: ETH1_U_BOTTOM_HEADER_WRP1.7@2387.5,1028.54 v1(2387.5,1124.5)
OUTSIDE_L_W6_U_BOTTOM_HEADER_WRP2: ETH1_U_BOTTOM_HEADER_WRP2.7 TH4.7 | length 192.9
  Top Layer w7: TH4.7@4253.54,2387.5 v1(4349.5,2387.5)
  Bottom Layer w7: v1(4349.5,2387.5) ETH1_U_BOTTOM_HEADER_WRP2.7@4446.46,2387.5
OUTSIDE_L_W6_U_BOTTOM_HEADER_WRP3: ETH1_U_BOTTOM_HEADER_WRP3.7 TH6.7 | length 192.9
  Top Layer w7: v1(1125.5,3087.5) TH6.7@1221.46,3087.5
  Bottom Layer w7: ETH1_U_BOTTOM_HEADER_WRP3.7@1028.54,3087.5 v1(1125.5,3087.5)
OUTSIDE_L_W6_U_BOTTOM_HEADER_WRP4: ETH1_U_BOTTOM_HEADER_WRP4.7 TH8.7 | length 848.9
  Top Layer w7: v1(3037,5142) 3087.5,5192.5 TH8.7@3087.5,5253.54
  Bottom Layer w7: v1(3037,5142) 3037,4496.96 ETH1_U_BOTTOM_HEADER_WRP4.7@3087.5,4446.46
OUTSIDE_L_W7_U_BOTTOM_HEADER_WRP1: ETH1_U_BOTTOM_HEADER_WRP1.8 TH2.8 | length 192.9
  Top Layer w7: v1(2487.5,1124.5) TH2.8@2487.5,1221.46
  Bottom Layer w7: ETH1_U_BOTTOM_HEADER_WRP1.8@2487.5,1028.54 v1(2487.5,1124.5)
OUTSIDE_L_W7_U_BOTTOM_HEADER_WRP2: ETH1_U_BOTTOM_HEADER_WRP2.8 TH4.8 | length 192.9
  Top Layer w7: TH4.8@4253.54,2487.5 v1(4349.5,2487.5)
  Bottom Layer w7: v1(4349.5,2487.5) ETH1_U_BOTTOM_HEADER_WRP2.8@4446.46,2487.5
OUTSIDE_L_W7_U_BOTTOM_HEADER_WRP3: ETH1_U_BOTTOM_HEADER_WRP3.8 TH6.8 | length 192.9
  Top Layer w7: v1(1125.5,2987.5) TH6.8@1221.46,2987.5
  Bottom Layer w7: ETH1_U_BOTTOM_HEADER_WRP3.8@1028.54,2987.5 v1(1125.5,2987.5)
OUTSIDE_L_W7_U_BOTTOM_HEADER_WRP4: ETH1_U_BOTTOM_HEADER_WRP4.8 TH8.8 | length 848.9
  Top Layer w7: v1(2937,5142) 2987.5,5192.5 TH8.8@2987.5,5253.54
  Bottom Layer w7: v1(2937,5142) 2937,4496.96 ETH1_U_BOTTOM_HEADER_WRP4.8@2987.5,4446.46
OUTSIDE_L_W8_U_BOTTOM_HEADER_WRP1: ETH1_U_BOTTOM_HEADER_WRP1.9 TH2.9 | length 192.9
  Top Layer w7: v1(2587.5,1124.5) TH2.9@2587.5,1221.46
  Bottom Layer w7: ETH1_U_BOTTOM_HEADER_WRP1.9@2587.5,1028.54 v1(2587.5,1124.5)
OUTSIDE_L_W8_U_BOTTOM_HEADER_WRP2: ETH1_U_BOTTOM_HEADER_WRP2.9 TH4.9 | length 192.9
  Top Layer w7: TH4.9@4253.54,2587.5 v1(4349.5,2587.5)
  Bottom Layer w7: v1(4349.5,2587.5) ETH1_U_BOTTOM_HEADER_WRP2.9@4446.46,2587.5
OUTSIDE_L_W8_U_BOTTOM_HEADER_WRP3: ETH1_U_BOTTOM_HEADER_WRP3.9 TH6.9 | length 192.9
  Top Layer w7: v1(1125.5,2887.5) TH6.9@1221.46,2887.5
  Bottom Layer w7: ETH1_U_BOTTOM_HEADER_WRP3.9@1028.54,2887.5 v1(1125.5,2887.5)
OUTSIDE_L_W8_U_BOTTOM_HEADER_WRP4: ETH1_U_BOTTOM_HEADER_WRP4.9 TH8.9 | length 848.9
  Top Layer w7: v1(2837,5142) 2887.5,5192.5 TH8.9@2887.5,5253.54
  Bottom Layer w7: v1(2837,5142) 2837,4496.96 ETH1_U_BOTTOM_HEADER_WRP4.9@2887.5,4446.46
OUTSIDE_L_W9_U_BOTTOM_HEADER_WRP1: ETH1_U_BOTTOM_HEADER_WRP1.10 TH2.10 | length 192.9
  Top Layer w7: v1(2687.5,1124.5) TH2.10@2687.5,1221.46
  Bottom Layer w7: ETH1_U_BOTTOM_HEADER_WRP1.10@2687.5,1028.54 v1(2687.5,1124.5)
OUTSIDE_L_W9_U_BOTTOM_HEADER_WRP2: ETH1_U_BOTTOM_HEADER_WRP2.10 TH4.10 | length 192.9
  Top Layer w7: TH4.10@4253.54,2687.5 v1(4349.5,2687.5)
  Bottom Layer w7: v1(4349.5,2687.5) ETH1_U_BOTTOM_HEADER_WRP2.10@4446.46,2687.5
OUTSIDE_L_W9_U_BOTTOM_HEADER_WRP3: ETH1_U_BOTTOM_HEADER_WRP3.10 TH6.10 | length 192.9
  Top Layer w7: v1(1125.5,2787.5) TH6.10@1221.46,2787.5
  Bottom Layer w7: ETH1_U_BOTTOM_HEADER_WRP3.10@1028.54,2787.5 v1(1125.5,2787.5)
OUTSIDE_L_W9_U_BOTTOM_HEADER_WRP4: ETH1_U_BOTTOM_HEADER_WRP4.10 TH8.10 | length 848.9
  Top Layer w7: v1(2737,5142) 2787.5,5192.5 TH8.10@2787.5,5253.54
  Bottom Layer w7: v1(2737,5142) 2737,4496.96 ETH1_U_BOTTOM_HEADER_WRP4.10@2787.5,4446.46
OUTSIDE_L_W10_U_BOTTOM_HEADER_WRP1: ETH1_U_BOTTOM_HEADER_WRP1.11 TH2.11 | length 192.9
  Top Layer w7: v1(2787.5,1124.5) TH2.11@2787.5,1221.46
  Bottom Layer w7: ETH1_U_BOTTOM_HEADER_WRP1.11@2787.5,1028.54 v1(2787.5,1124.5)
OUTSIDE_L_W10_U_BOTTOM_HEADER_WRP2: ETH1_U_BOTTOM_HEADER_WRP2.11 TH4.11 | length 192.9
  Top Layer w7: TH4.11@4253.54,2787.5 v1(4349.5,2787.5)
  Bottom Layer w7: v1(4349.5,2787.5) ETH1_U_BOTTOM_HEADER_WRP2.11@4446.46,2787.5
OUTSIDE_L_W10_U_BOTTOM_HEADER_WRP3: ETH1_U_BOTTOM_HEADER_WRP3.11 TH6.11 | length 192.9
  Top Layer w7: v1(1125.5,2687.5) TH6.11@1221.46,2687.5
  Bottom Layer w7: ETH1_U_BOTTOM_HEADER_WRP3.11@1028.54,2687.5 v1(1125.5,2687.5)
OUTSIDE_L_W10_U_BOTTOM_HEADER_WRP4: ETH1_U_BOTTOM_HEADER_WRP4.11 TH8.11 | length 848.9
  Top Layer w7: v1(2637,5142) 2687.5,5192.5 TH8.11@2687.5,5253.54
  Bottom Layer w7: v1(2637,5142) 2637,4496.96 ETH1_U_BOTTOM_HEADER_WRP4.11@2687.5,4446.46
OUTSIDE_L_W11_U_BOTTOM_HEADER_WRP1: ETH1_U_BOTTOM_HEADER_WRP1.12 TH2.12 | length 192.9
  Top Layer w7: v1(2887.5,1124.5) TH2.12@2887.5,1221.46
  Bottom Layer w7: ETH1_U_BOTTOM_HEADER_WRP1.12@2887.5,1028.54 v1(2887.5,1124.5)
OUTSIDE_L_W11_U_BOTTOM_HEADER_WRP2: ETH1_U_BOTTOM_HEADER_WRP2.12 TH4.12 | length 192.9
  Top Layer w7: TH4.12@4253.54,2887.5 v1(4349.5,2887.5)
  Bottom Layer w7: v1(4349.5,2887.5) ETH1_U_BOTTOM_HEADER_WRP2.12@4446.46,2887.5
OUTSIDE_L_W11_U_BOTTOM_HEADER_WRP3: ETH1_U_BOTTOM_HEADER_WRP3.12 TH6.12 | length 192.9
  Top Layer w7: v1(1125.5,2587.5) TH6.12@1221.46,2587.5
  Bottom Layer w7: ETH1_U_BOTTOM_HEADER_WRP3.12@1028.54,2587.5 v1(1125.5,2587.5)
OUTSIDE_L_W11_U_BOTTOM_HEADER_WRP4: ETH1_U_BOTTOM_HEADER_WRP4.12 TH8.12 | length 848.9
  Top Layer w7: v1(2537,5142) 2587.5,5192.5 TH8.12@2587.5,5253.54
  Bottom Layer w7: v1(2537,5142) 2537,4496.96 ETH1_U_BOTTOM_HEADER_WRP4.12@2587.5,4446.46
OUTSIDE_L_W12_U_BOTTOM_HEADER_WRP1: ETH1_U_BOTTOM_HEADER_WRP1.13 TH2.13 | length 192.9
  Top Layer w7: v1(2987.5,1124.5) TH2.13@2987.5,1221.46
  Bottom Layer w7: ETH1_U_BOTTOM_HEADER_WRP1.13@2987.5,1028.54 v1(2987.5,1124.5)
OUTSIDE_L_W12_U_BOTTOM_HEADER_WRP2: ETH1_U_BOTTOM_HEADER_WRP2.13 TH4.13 | length 192.9
  Top Layer w7: TH4.13@4253.54,2987.5 v1(4349.5,2987.5)
  Bottom Layer w7: v1(4349.5,2987.5) ETH1_U_BOTTOM_HEADER_WRP2.13@4446.46,2987.5
OUTSIDE_L_W12_U_BOTTOM_HEADER_WRP3: ETH1_U_BOTTOM_HEADER_WRP3.13 TH6.13 | length 192.9
  Top Layer w7: v1(1125.5,2487.5) TH6.13@1221.46,2487.5
  Bottom Layer w7: ETH1_U_BOTTOM_HEADER_WRP3.13@1028.54,2487.5 v1(1125.5,2487.5)
OUTSIDE_L_W12_U_BOTTOM_HEADER_WRP4: ETH1_U_BOTTOM_HEADER_WRP4.13 TH8.13 | length 848.9
  Top Layer w7: v1(2437,5142) 2487.5,5192.5 TH8.13@2487.5,5253.54
  Bottom Layer w7: v1(2437,5142) 2437,4496.96 ETH1_U_BOTTOM_HEADER_WRP4.13@2487.5,4446.46
OUTSIDE_L_W13_U_BOTTOM_HEADER_WRP1: ETH1_U_BOTTOM_HEADER_WRP1.14 TH2.14 | length 192.9
  Top Layer w7: v1(3087.5,1124.5) TH2.14@3087.5,1221.46
  Bottom Layer w7: ETH1_U_BOTTOM_HEADER_WRP1.14@3087.5,1028.54 v1(3087.5,1124.5)
OUTSIDE_L_W13_U_BOTTOM_HEADER_WRP2: ETH1_U_BOTTOM_HEADER_WRP2.14 TH4.14 | length 192.9
  Top Layer w7: TH4.14@4253.54,3087.5 v1(4349.5,3087.5)
  Bottom Layer w7: v1(4349.5,3087.5) ETH1_U_BOTTOM_HEADER_WRP2.14@4446.46,3087.5
OUTSIDE_L_W13_U_BOTTOM_HEADER_WRP3: ETH1_U_BOTTOM_HEADER_WRP3.14 TH6.14 | length 192.9
  Top Layer w7: v1(1125.5,2387.5) TH6.14@1221.46,2387.5
  Bottom Layer w7: ETH1_U_BOTTOM_HEADER_WRP3.14@1028.54,2387.5 v1(1125.5,2387.5)
OUTSIDE_L_W13_U_BOTTOM_HEADER_WRP4: ETH1_U_BOTTOM_HEADER_WRP4.14 TH8.14 | length 848.9
  Top Layer w7: v1(2337,5142) 2387.5,5192.5 TH8.14@2387.5,5253.54
  Bottom Layer w7: v1(2337,5142) 2337,4496.96 ETH1_U_BOTTOM_HEADER_WRP4.14@2387.5,4446.46
OUTSIDE_L_W14_U_BOTTOM_HEADER_WRP1: ETH1_U_BOTTOM_HEADER_WRP1.15 TH2.15 | length 192.9
  Top Layer w7: v1(3187.5,1124.5) TH2.15@3187.5,1221.46
  Bottom Layer w7: ETH1_U_BOTTOM_HEADER_WRP1.15@3187.5,1028.54 v1(3187.5,1124.5)
OUTSIDE_L_W14_U_BOTTOM_HEADER_WRP2: ETH1_U_BOTTOM_HEADER_WRP2.15 TH4.15 | length 192.9
  Top Layer w7: TH4.15@4253.54,3187.5 v1(4349.5,3187.5)
  Bottom Layer w7: v1(4349.5,3187.5) ETH1_U_BOTTOM_HEADER_WRP2.15@4446.46,3187.5
OUTSIDE_L_W14_U_BOTTOM_HEADER_WRP3: ETH1_U_BOTTOM_HEADER_WRP3.15 TH6.15 | length 192.9
  Top Layer w7: v1(1125.5,2287.5) TH6.15@1221.46,2287.5
  Bottom Layer w7: ETH1_U_BOTTOM_HEADER_WRP3.15@1028.54,2287.5 v1(1125.5,2287.5)
OUTSIDE_L_W14_U_BOTTOM_HEADER_WRP4: ETH1_U_BOTTOM_HEADER_WRP4.15 TH8.15 | length 848.9
  Top Layer w7: v1(2237,5142) 2287.5,5192.5 TH8.15@2287.5,5253.54
  Bottom Layer w7: v1(2237,5142) 2237,4496.96 ETH1_U_BOTTOM_HEADER_WRP4.15@2287.5,4446.46
OUTSIDE_L_W15_U_BOTTOM_HEADER_WRP1: ETH1_U_BOTTOM_HEADER_WRP1.16 TH2.16 | length 192.9
  Top Layer w7: v1(3287.5,1124.5) TH2.16@3287.5,1221.46
  Bottom Layer w7: ETH1_U_BOTTOM_HEADER_WRP1.16@3287.5,1028.54 v1(3287.5,1124.5)
OUTSIDE_L_W15_U_BOTTOM_HEADER_WRP2: ETH1_U_BOTTOM_HEADER_WRP2.16 TH4.16 | length 192.9
  Top Layer w7: TH4.16@4253.54,3287.5 v1(4349.5,3287.5)
  Bottom Layer w7: v1(4349.5,3287.5) ETH1_U_BOTTOM_HEADER_WRP2.16@4446.46,3287.5
OUTSIDE_L_W15_U_BOTTOM_HEADER_WRP3: ETH1_U_BOTTOM_HEADER_WRP3.16 TH6.16 | length 192.9
  Top Layer w7: v1(1125.5,2187.5) TH6.16@1221.46,2187.5
  Bottom Layer w7: ETH1_U_BOTTOM_HEADER_WRP3.16@1028.54,2187.5 v1(1125.5,2187.5)
OUTSIDE_L_W15_U_BOTTOM_HEADER_WRP4: ETH1_U_BOTTOM_HEADER_WRP4.16 TH8.16 | length 848.9
  Top Layer w7: v1(2137,5142) 2187.5,5192.5 TH8.16@2187.5,5253.54
  Bottom Layer w7: v1(2137,5142) 2137,4496.96 ETH1_U_BOTTOM_HEADER_WRP4.16@2187.5,4446.46
OUTSIDE_R_W0_U_BOTTOM_HEADER_WRP1: ETH1_U_BOTTOM_HEADER_WRP1.40 TH3.1@1787.5,221.46 | length 542.7
  Top Layer w7: TH3.1@1787.5,221.46 1788,221.96 v1(1788,335)
  Bottom Layer w7: ETH1_U_BOTTOM_HEADER_WRP1.40@1787.5,721.46 1839,669.96 1839,386 v1(1788,335)
OUTSIDE_R_W0_U_BOTTOM_HEADER_WRP2: ETH1_U_BOTTOM_HEADER_WRP2.40 TH3.1@5253.54,1787.5 | length 503.5
  Top Layer w7: v1(5143.5,1787.5) TH3.1@5253.54,1787.5
  Bottom Layer w7: ETH1_U_BOTTOM_HEADER_WRP2.40@4753.54,1787.5 v1(5143.5,1787.5) v1@5146,1785
OUTSIDE_R_W0_U_BOTTOM_HEADER_WRP3: ETH1_U_BOTTOM_HEADER_WRP3.40 TH5.1 | length 500
  Top Layer w7: TH5.1@221.46,3687.5 v1(315,3687.5)
  Bottom Layer w7: v1(315,3687.5) ETH1_U_BOTTOM_HEADER_WRP3.40@721.46,3687.5
OUTSIDE_R_W0_U_BOTTOM_HEADER_WRP4: ETH1_U_BOTTOM_HEADER_WRP4.40 TH7.1 | length 500
  Top Layer w7: TH7.1@3687.5,4253.54 v1(3687.5,4606.5)
  Bottom Layer w7: v1(3687.5,4606.5) ETH1_U_BOTTOM_HEADER_WRP4.40@3687.5,4753.54
OUTSIDE_R_W1_U_BOTTOM_HEADER_WRP1: ETH1_U_BOTTOM_HEADER_WRP1.39 TH3.2@1887.5,221.46 | length 542.7
  Top Layer w7: TH3.2@1887,220.96 TH3.2@1887.5,221.46 v1(1887.5,334.5)
  Bottom Layer w7: ETH1_U_BOTTOM_HEADER_WRP1.39@1887,720.96 1938.5,669.46 1938.5,385.5 v1(1887.5,334.5)
OUTSIDE_R_W1_U_BOTTOM_HEADER_WRP2: ETH1_U_BOTTOM_HEADER_WRP2.39 TH3.2@5253.54,1887.5 | length 503.5
  Top Layer w7: v1(5143.5,1887.5) TH3.2@5253.54,1887.5
  Bottom Layer w7: ETH1_U_BOTTOM_HEADER_WRP2.39@4753.54,1887.5 v1(5143.5,1887.5) v1@5146,1885
OUTSIDE_R_W1_U_BOTTOM_HEADER_WRP3: ETH1_U_BOTTOM_HEADER_WRP3.39 TH5.2 | length 500
  Top Layer w7: TH5.2@221.46,3587.5 v1(315,3587.5)
  Bottom Layer w7: v1(315,3587.5) ETH1_U_BOTTOM_HEADER_WRP3.39@721.46,3587.5
OUTSIDE_R_W1_U_BOTTOM_HEADER_WRP4: ETH1_U_BOTTOM_HEADER_WRP4.39 TH7.2 | length 500
  Top Layer w7: TH7.2@3587.5,4253.54 v1(3587.5,4606.5)
  Bottom Layer w7: v1(3587.5,4606.5) ETH1_U_BOTTOM_HEADER_WRP4.39@3587.5,4753.54
OUTSIDE_R_W2_U_BOTTOM_HEADER_WRP1: ETH1_U_BOTTOM_HEADER_WRP1.38 TH3.3@1987.5,221.46 | length 542.7
  Top Layer w7: TH3.3@1987,220.96 TH3.3@1987.5,221.46 v1(1987.5,334.5)
  Bottom Layer w7: ETH1_U_BOTTOM_HEADER_WRP1.38@1987,720.96 2038.5,669.46 2038.5,385.5 v1(1987.5,334.5)
OUTSIDE_R_W2_U_BOTTOM_HEADER_WRP2: ETH1_U_BOTTOM_HEADER_WRP2.38 TH3.3@5253.54,1987.5 | length 503.5
  Top Layer w7: v1(5143.5,1987.5) TH3.3@5253.54,1987.5
  Bottom Layer w7: ETH1_U_BOTTOM_HEADER_WRP2.38@4753.54,1987.5 v1(5143.5,1987.5) v1@5146,1985
OUTSIDE_R_W2_U_BOTTOM_HEADER_WRP3: ETH1_U_BOTTOM_HEADER_WRP3.38 TH5.3 | length 500
  Top Layer w7: TH5.3@221.46,3487.5 v1(315,3487.5)
  Bottom Layer w7: v1(315,3487.5) ETH1_U_BOTTOM_HEADER_WRP3.38@721.46,3487.5
OUTSIDE_R_W2_U_BOTTOM_HEADER_WRP4: ETH1_U_BOTTOM_HEADER_WRP4.38 TH7.3 | length 500
  Top Layer w7: TH7.3@3487.5,4253.54 v1(3487.5,4606.5)
  Bottom Layer w7: v1(3487.5,4606.5) ETH1_U_BOTTOM_HEADER_WRP4.38@3487.5,4753.54
OUTSIDE_R_W3_U_BOTTOM_HEADER_WRP1: ETH1_U_BOTTOM_HEADER_WRP1.37 TH3.4@2087.5,221.46 | length 542.7
  Top Layer w7: TH3.4@2087,220.96 TH3.4@2087.5,221.46 v1(2087.5,334.5)
  Bottom Layer w7: ETH1_U_BOTTOM_HEADER_WRP1.37@2087,720.96 2138.5,669.46 2138.5,385.5 v1(2087.5,334.5)
OUTSIDE_R_W3_U_BOTTOM_HEADER_WRP2: ETH1_U_BOTTOM_HEADER_WRP2.37 TH3.4@5253.54,2087.5 | length 503.5
  Top Layer w7: v1(5143.5,2087.5) TH3.4@5253.54,2087.5
  Bottom Layer w7: ETH1_U_BOTTOM_HEADER_WRP2.37@4753.54,2087.5 v1(5143.5,2087.5) v1@5146,2085
OUTSIDE_R_W3_U_BOTTOM_HEADER_WRP3: ETH1_U_BOTTOM_HEADER_WRP3.37 TH5.4 | length 500
  Top Layer w7: TH5.4@221.46,3387.5 v1(315,3387.5)
  Bottom Layer w7: v1(315,3387.5) ETH1_U_BOTTOM_HEADER_WRP3.37@721.46,3387.5
OUTSIDE_R_W3_U_BOTTOM_HEADER_WRP4: ETH1_U_BOTTOM_HEADER_WRP4.37 TH7.4 | length 500
  Top Layer w7: TH7.4@3387.5,4253.54 v1(3387.5,4606.5)
  Bottom Layer w7: v1(3387.5,4606.5) ETH1_U_BOTTOM_HEADER_WRP4.37@3387.5,4753.54
OUTSIDE_R_W4_U_BOTTOM_HEADER_WRP1: ETH1_U_BOTTOM_HEADER_WRP1.36 TH3.5@2187.5,221.46 | length 542.7
  Top Layer w7: TH3.5@2187,220.96 TH3.5@2187.5,221.46 v1(2187.5,334.5)
  Bottom Layer w7: ETH1_U_BOTTOM_HEADER_WRP1.36@2187,720.96 2238.5,669.46 2238.5,385.5 v1(2187.5,334.5)
OUTSIDE_R_W4_U_BOTTOM_HEADER_WRP2: ETH1_U_BOTTOM_HEADER_WRP2.36 TH3.5@5253.54,2187.5 | length 503.5
  Top Layer w7: v1(5143.5,2187.5) TH3.5@5253.54,2187.5
  Bottom Layer w7: ETH1_U_BOTTOM_HEADER_WRP2.36@4753.54,2187.5 v1(5143.5,2187.5) v1@5146,2185
OUTSIDE_R_W4_U_BOTTOM_HEADER_WRP3: ETH1_U_BOTTOM_HEADER_WRP3.36 TH5.5 | length 500
  Top Layer w7: TH5.5@221.46,3287.5 v1(315,3287.5)
  Bottom Layer w7: v1(315,3287.5) ETH1_U_BOTTOM_HEADER_WRP3.36@721.46,3287.5
OUTSIDE_R_W4_U_BOTTOM_HEADER_WRP4: ETH1_U_BOTTOM_HEADER_WRP4.36 TH7.5 | length 500
  Top Layer w7: TH7.5@3287.5,4253.54 v1(3287.5,4606.5)
  Bottom Layer w7: v1(3287.5,4606.5) ETH1_U_BOTTOM_HEADER_WRP4.36@3287.5,4753.54
OUTSIDE_R_W5_U_BOTTOM_HEADER_WRP1: ETH1_U_BOTTOM_HEADER_WRP1.35 TH3.6@2287.5,221.46 | length 542.7
  Top Layer w7: TH3.6@2287,220.96 TH3.6@2287.5,221.46 v1(2287.5,334.5)
  Bottom Layer w7: ETH1_U_BOTTOM_HEADER_WRP1.35@2287,720.96 2338.5,669.46 2338.5,385.5 v1(2287.5,334.5)
OUTSIDE_R_W5_U_BOTTOM_HEADER_WRP2: ETH1_U_BOTTOM_HEADER_WRP2.35 TH3.6@5253.54,2287.5 | length 503.5
  Top Layer w7: v1(5143.5,2287.5) TH3.6@5253.54,2287.5
  Bottom Layer w7: ETH1_U_BOTTOM_HEADER_WRP2.35@4753.54,2287.5 v1(5143.5,2287.5) v1@5146,2285
OUTSIDE_R_W5_U_BOTTOM_HEADER_WRP3: ETH1_U_BOTTOM_HEADER_WRP3.35 TH5.6 | length 500
  Top Layer w7: TH5.6@221.46,3187.5 v1(315,3187.5)
  Bottom Layer w7: v1(315,3187.5) ETH1_U_BOTTOM_HEADER_WRP3.35@721.46,3187.5
OUTSIDE_R_W5_U_BOTTOM_HEADER_WRP4: ETH1_U_BOTTOM_HEADER_WRP4.35 TH7.6 | length 500
  Top Layer w7: TH7.6@3187.5,4253.54 v1(3187.5,4606.5)
  Bottom Layer w7: v1(3187.5,4606.5) ETH1_U_BOTTOM_HEADER_WRP4.35@3187.5,4753.54
OUTSIDE_R_W6_U_BOTTOM_HEADER_WRP1: ETH1_U_BOTTOM_HEADER_WRP1.34 TH3.7@2387.5,221.46 | length 542.7
  Top Layer w7: TH3.7@2387,220.96 TH3.7@2387.5,221.46 v1(2387.5,334.5)
  Bottom Layer w7: ETH1_U_BOTTOM_HEADER_WRP1.34@2387,720.96 2438.5,669.46 2438.5,385.5 v1(2387.5,334.5)
OUTSIDE_R_W6_U_BOTTOM_HEADER_WRP2: ETH1_U_BOTTOM_HEADER_WRP2.34 TH3.7@5253.54,2387.5 | length 503.5
  Top Layer w7: v1(5143.5,2387.5) TH3.7@5253.54,2387.5
  Bottom Layer w7: ETH1_U_BOTTOM_HEADER_WRP2.34@4753.54,2387.5 v1(5143.5,2387.5) v1@5146,2385
OUTSIDE_R_W6_U_BOTTOM_HEADER_WRP3: ETH1_U_BOTTOM_HEADER_WRP3.34 TH5.7 | length 500
  Top Layer w7: TH5.7@221.46,3087.5 v1(315,3087.5)
  Bottom Layer w7: v1(315,3087.5) ETH1_U_BOTTOM_HEADER_WRP3.34@721.46,3087.5
OUTSIDE_R_W6_U_BOTTOM_HEADER_WRP4: ETH1_U_BOTTOM_HEADER_WRP4.34 TH7.7 | length 500
  Top Layer w7: TH7.7@3087.5,4253.54 v1(3087.5,4606.5)
  Bottom Layer w7: v1(3087.5,4606.5) ETH1_U_BOTTOM_HEADER_WRP4.34@3087.5,4753.54
OUTSIDE_R_W7_U_BOTTOM_HEADER_WRP1: ETH1_U_BOTTOM_HEADER_WRP1.33 TH3.8@2487.5,221.46 | length 542.7
  Top Layer w7: TH3.8@2487,220.96 TH3.8@2487.5,221.46 v1(2487.5,334.5)
  Bottom Layer w7: ETH1_U_BOTTOM_HEADER_WRP1.33@2487,720.96 2538.5,669.46 2538.5,385.5 v1(2487.5,334.5)
OUTSIDE_R_W7_U_BOTTOM_HEADER_WRP2: ETH1_U_BOTTOM_HEADER_WRP2.33 TH3.8@5253.54,2487.5 | length 503.5
  Top Layer w7: v1(5143.5,2487.5) TH3.8@5253.54,2487.5
  Bottom Layer w7: ETH1_U_BOTTOM_HEADER_WRP2.33@4753.54,2487.5 v1(5143.5,2487.5) v1@5146,2485
OUTSIDE_R_W7_U_BOTTOM_HEADER_WRP3: ETH1_U_BOTTOM_HEADER_WRP3.33 TH5.8 | length 500
  Top Layer w7: TH5.8@221.46,2987.5 v1(315,2987.5)
  Bottom Layer w7: v1(315,2987.5) ETH1_U_BOTTOM_HEADER_WRP3.33@721.46,2987.5
OUTSIDE_R_W7_U_BOTTOM_HEADER_WRP4: ETH1_U_BOTTOM_HEADER_WRP4.33 TH7.8 | length 500
  Top Layer w7: TH7.8@2987.5,4253.54 v1(2987.5,4606.5)
  Bottom Layer w7: v1(2987.5,4606.5) ETH1_U_BOTTOM_HEADER_WRP4.33@2987.5,4753.54
OUTSIDE_R_W8_U_BOTTOM_HEADER_WRP1: ETH1_U_BOTTOM_HEADER_WRP1.32 TH3.9@2587.5,221.46 | length 542.7
  Top Layer w7: TH3.9@2587,220.96 TH3.9@2587.5,221.46 v1(2587.5,334.5)
  Bottom Layer w7: ETH1_U_BOTTOM_HEADER_WRP1.32@2587,720.96 2638.5,669.46 2638.5,385.5 v1(2587.5,334.5)
OUTSIDE_R_W8_U_BOTTOM_HEADER_WRP2: ETH1_U_BOTTOM_HEADER_WRP2.32 TH3.9@5253.54,2587.5 | length 503.5
  Top Layer w7: v1(5143.5,2587.5) TH3.9@5253.54,2587.5
  Bottom Layer w7: ETH1_U_BOTTOM_HEADER_WRP2.32@4753.54,2587.5 v1(5143.5,2587.5) v1@5146,2585
OUTSIDE_R_W8_U_BOTTOM_HEADER_WRP3: ETH1_U_BOTTOM_HEADER_WRP3.32 TH5.9 | length 500
  Top Layer w7: TH5.9@221.46,2887.5 v1(315,2887.5)
  Bottom Layer w7: v1(315,2887.5) ETH1_U_BOTTOM_HEADER_WRP3.32@721.46,2887.5
OUTSIDE_R_W8_U_BOTTOM_HEADER_WRP4: ETH1_U_BOTTOM_HEADER_WRP4.32 TH7.9 | length 500
  Top Layer w7: TH7.9@2887.5,4253.54 v1(2887.5,4606.5)
  Bottom Layer w7: v1(2887.5,4606.5) ETH1_U_BOTTOM_HEADER_WRP4.32@2887.5,4753.54
OUTSIDE_R_W9_U_BOTTOM_HEADER_WRP1: ETH1_U_BOTTOM_HEADER_WRP1.31 TH3.10@2687.5,221.46 | length 542.7
  Top Layer w7: TH3.10@2687,220.96 TH3.10@2687.5,221.46 v1(2687.5,334.5)
  Bottom Layer w7: ETH1_U_BOTTOM_HEADER_WRP1.31@2687,720.96 2738.5,669.46 2738.5,385.5 v1(2687.5,334.5)
OUTSIDE_R_W9_U_BOTTOM_HEADER_WRP2: ETH1_U_BOTTOM_HEADER_WRP2.31 TH3.10@5253.54,2687.5 | length 503.5
  Top Layer w7: v1(5143.5,2687.5) TH3.10@5253.54,2687.5
  Bottom Layer w7: ETH1_U_BOTTOM_HEADER_WRP2.31@4753.54,2687.5 v1(5143.5,2687.5) v1@5146,2685
OUTSIDE_R_W9_U_BOTTOM_HEADER_WRP3: ETH1_U_BOTTOM_HEADER_WRP3.31 TH5.10 | length 500
  Top Layer w7: TH5.10@221.46,2787.5 v1(315,2787.5)
  Bottom Layer w7: v1(315,2787.5) ETH1_U_BOTTOM_HEADER_WRP3.31@721.46,2787.5
OUTSIDE_R_W9_U_BOTTOM_HEADER_WRP4: ETH1_U_BOTTOM_HEADER_WRP4.31 TH7.10 | length 500
  Top Layer w7: TH7.10@2787.5,4253.54 v1(2787.5,4606.5)
  Bottom Layer w7: v1(2787.5,4606.5) ETH1_U_BOTTOM_HEADER_WRP4.31@2787.5,4753.54
OUTSIDE_R_W10_U_BOTTOM_HEADER_WRP1: ETH1_U_BOTTOM_HEADER_WRP1.30 TH3.11@2787.5,221.46 | length 542.7
  Top Layer w7: TH3.11@2787,220.96 TH3.11@2787.5,221.46 v1(2787.5,334.5)
  Bottom Layer w7: ETH1_U_BOTTOM_HEADER_WRP1.30@2787,720.96 2838.5,669.46 2838.5,385.5 v1(2787.5,334.5)
OUTSIDE_R_W10_U_BOTTOM_HEADER_WRP2: ETH1_U_BOTTOM_HEADER_WRP2.30 TH3.11@5253.54,2787.5 | length 503.5
  Top Layer w7: v1(5143.5,2787.5) TH3.11@5253.54,2787.5
  Bottom Layer w7: ETH1_U_BOTTOM_HEADER_WRP2.30@4753.54,2787.5 v1(5143.5,2787.5) v1@5146,2785
OUTSIDE_R_W10_U_BOTTOM_HEADER_WRP3: ETH1_U_BOTTOM_HEADER_WRP3.30 TH5.11 | length 500
  Top Layer w7: TH5.11@221.46,2687.5 v1(315,2687.5)
  Bottom Layer w7: v1(315,2687.5) ETH1_U_BOTTOM_HEADER_WRP3.30@721.46,2687.5
OUTSIDE_R_W10_U_BOTTOM_HEADER_WRP4: ETH1_U_BOTTOM_HEADER_WRP4.30 TH7.11 | length 500
  Top Layer w7: TH7.11@2687.5,4253.54 v1(2687.5,4606.5)
  Bottom Layer w7: v1(2687.5,4606.5) ETH1_U_BOTTOM_HEADER_WRP4.30@2687.5,4753.54
OUTSIDE_R_W11_U_BOTTOM_HEADER_WRP1: ETH1_U_BOTTOM_HEADER_WRP1.29 TH3.12@2887.5,221.46 | length 542.7
  Top Layer w7: TH3.12@2887,220.96 TH3.12@2887.5,221.46 v1(2887.5,334.5)
  Bottom Layer w7: ETH1_U_BOTTOM_HEADER_WRP1.29@2887,720.96 2938.5,669.46 2938.5,385.5 v1(2887.5,334.5)
OUTSIDE_R_W11_U_BOTTOM_HEADER_WRP2: ETH1_U_BOTTOM_HEADER_WRP2.29 TH3.12@5253.54,2887.5 | length 503.5
  Top Layer w7: v1(5143.5,2887.5) TH3.12@5253.54,2887.5
  Bottom Layer w7: ETH1_U_BOTTOM_HEADER_WRP2.29@4753.54,2887.5 v1(5143.5,2887.5) v1@5146,2885
OUTSIDE_R_W11_U_BOTTOM_HEADER_WRP3: ETH1_U_BOTTOM_HEADER_WRP3.29 TH5.12 | length 500
  Top Layer w7: TH5.12@221.46,2587.5 v1(315,2587.5)
  Bottom Layer w7: v1(315,2587.5) ETH1_U_BOTTOM_HEADER_WRP3.29@721.46,2587.5
OUTSIDE_R_W11_U_BOTTOM_HEADER_WRP4: ETH1_U_BOTTOM_HEADER_WRP4.29 TH7.12 | length 500
  Top Layer w7: TH7.12@2587.5,4253.54 v1(2587.5,4606.5)
  Bottom Layer w7: v1(2587.5,4606.5) ETH1_U_BOTTOM_HEADER_WRP4.29@2587.5,4753.54
OUTSIDE_R_W12_U_BOTTOM_HEADER_WRP1: ETH1_U_BOTTOM_HEADER_WRP1.28 TH3.13@2987.5,221.46 | length 542.7
  Top Layer w7: TH3.13@2987,220.96 TH3.13@2987.5,221.46 v1(2987.5,334.5)
  Bottom Layer w7: ETH1_U_BOTTOM_HEADER_WRP1.28@2987,720.96 3038.5,669.46 3038.5,385.5 v1(2987.5,334.5)
OUTSIDE_R_W12_U_BOTTOM_HEADER_WRP2: ETH1_U_BOTTOM_HEADER_WRP2.28 TH3.13@5253.54,2987.5 | length 503.5
  Top Layer w7: v1(5143.5,2987.5) TH3.13@5253.54,2987.5
  Bottom Layer w7: ETH1_U_BOTTOM_HEADER_WRP2.28@4753.54,2987.5 v1(5143.5,2987.5) v1@5146,2985
OUTSIDE_R_W12_U_BOTTOM_HEADER_WRP3: ETH1_U_BOTTOM_HEADER_WRP3.28 TH5.13 | length 500
  Top Layer w7: TH5.13@221.46,2487.5 v1(315,2487.5)
  Bottom Layer w7: v1(315,2487.5) ETH1_U_BOTTOM_HEADER_WRP3.28@721.46,2487.5
OUTSIDE_R_W12_U_BOTTOM_HEADER_WRP4: ETH1_U_BOTTOM_HEADER_WRP4.28 TH7.13 | length 500
  Top Layer w7: TH7.13@2487.5,4253.54 v1(2487.5,4606.5)
  Bottom Layer w7: v1(2487.5,4606.5) ETH1_U_BOTTOM_HEADER_WRP4.28@2487.5,4753.54
OUTSIDE_R_W13_U_BOTTOM_HEADER_WRP1: ETH1_U_BOTTOM_HEADER_WRP1.27 TH3.14@3087.5,221.46 | length 542.7
  Top Layer w7: TH3.14@3087,220.96 TH3.14@3087.5,221.46 v1(3087.5,334.5)
  Bottom Layer w7: ETH1_U_BOTTOM_HEADER_WRP1.27@3087,720.96 3138.5,669.46 3138.5,385.5 v1(3087.5,334.5)
OUTSIDE_R_W13_U_BOTTOM_HEADER_WRP2: ETH1_U_BOTTOM_HEADER_WRP2.27 TH3.14@5253.54,3087.5 | length 503.5
  Top Layer w7: v1(5143.5,3087.5) TH3.14@5253.54,3087.5
  Bottom Layer w7: ETH1_U_BOTTOM_HEADER_WRP2.27@4753.54,3087.5 v1(5143.5,3087.5) v1@5146,3085
OUTSIDE_R_W13_U_BOTTOM_HEADER_WRP3: ETH1_U_BOTTOM_HEADER_WRP3.27 TH5.14 | length 500
  Top Layer w7: TH5.14@221.46,2387.5 v1(315,2387.5)
  Bottom Layer w7: v1(315,2387.5) ETH1_U_BOTTOM_HEADER_WRP3.27@721.46,2387.5
OUTSIDE_R_W13_U_BOTTOM_HEADER_WRP4: ETH1_U_BOTTOM_HEADER_WRP4.27 TH7.14 | length 500
  Top Layer w7: TH7.14@2387.5,4253.54 v1(2387.5,4606.5)
  Bottom Layer w7: v1(2387.5,4606.5) ETH1_U_BOTTOM_HEADER_WRP4.27@2387.5,4753.54
OUTSIDE_R_W14_U_BOTTOM_HEADER_WRP1: ETH1_U_BOTTOM_HEADER_WRP1.26 TH3.15@3187.5,221.46 | length 542.7
  Top Layer w7: TH3.15@3187,220.96 TH3.15@3187.5,221.46 v1(3187.5,334.5)
  Bottom Layer w7: ETH1_U_BOTTOM_HEADER_WRP1.26@3187,720.96 3238.5,669.46 3238.5,385.5 v1(3187.5,334.5)
OUTSIDE_R_W14_U_BOTTOM_HEADER_WRP2: ETH1_U_BOTTOM_HEADER_WRP2.26 TH3.15@5253.54,3187.5 | length 1007.1
  Top Layer w7: v1@5143.5,3187.5 TH3.15@5253.54,3187.5 ; v1(5148.04,3187.5) TH3.15@5258.09,3187.5
  Bottom Layer w7: ETH1_U_BOTTOM_HEADER_WRP2.26@4753.54,3187.5 5143.5,3187.5 v1@5146,3185 ; ETH1_U_BOTTOM_HEADER_WRP2.26@4758.09,3187.5 v1(5148.04,3187.5) v1@5150.54,3185
OUTSIDE_R_W14_U_BOTTOM_HEADER_WRP3: ETH1_U_BOTTOM_HEADER_WRP3.26 TH5.15 | length 500
  Top Layer w7: TH5.15@221.46,2287.5 v1(315,2287.5)
  Bottom Layer w7: v1(315,2287.5) ETH1_U_BOTTOM_HEADER_WRP3.26@721.46,2287.5
OUTSIDE_R_W14_U_BOTTOM_HEADER_WRP4: ETH1_U_BOTTOM_HEADER_WRP4.26 TH7.15 | length 500
  Top Layer w7: TH7.15@2287.5,4253.54 v1(2287.5,4606.5)
  Bottom Layer w7: v1(2287.5,4606.5) ETH1_U_BOTTOM_HEADER_WRP4.26@2287.5,4753.54
OUTSIDE_R_W15_U_BOTTOM_HEADER_WRP1: ETH1_U_BOTTOM_HEADER_WRP1.25 TH3.16@3287.5,221.46 | length 542.7
  Top Layer w7: TH3.16@3287,220.96 TH3.16@3287.5,221.46 v1(3287.5,334.5)
  Bottom Layer w7: ETH1_U_BOTTOM_HEADER_WRP1.25@3287,720.96 3338.5,669.46 3338.5,385.5 v1(3287.5,334.5)
OUTSIDE_R_W15_U_BOTTOM_HEADER_WRP2: ETH1_U_BOTTOM_HEADER_WRP2.25 TH3.16@5253.54,3287.5 | length 503.5
  Top Layer w7: v1(5148.04,3287.5) TH3.16@5258.09,3287.5
  Bottom Layer w7: ETH1_U_BOTTOM_HEADER_WRP2.25@4758.09,3287.5 v1(5148.04,3287.5) v1@5150.54,3285
OUTSIDE_R_W15_U_BOTTOM_HEADER_WRP3: ETH1_U_BOTTOM_HEADER_WRP3.25 TH5.16 | length 500
  Top Layer w7: TH5.16@221.46,2187.5 v1(315,2187.5)
  Bottom Layer w7: v1(315,2187.5) ETH1_U_BOTTOM_HEADER_WRP3.25@721.46,2187.5
OUTSIDE_R_W15_U_BOTTOM_HEADER_WRP4: ETH1_U_BOTTOM_HEADER_WRP4.25 TH7.16 | length 500.7
  Top Layer w7: v1@2187,4607 v1(2187.5,4606.5) TH7.16@2187.5,4253.54
  Bottom Layer w7: v1(2187.5,4606.5) ETH1_U_BOTTOM_HEADER_WRP4.25@2187.5,4753.54
SER0: OB15.DS OB16.Q
SER1: OB14.DS OB15.Q
SER2: OB13.DS OB14.Q
SER3: OB12.DS OB13.Q
SER4: OB11.DS OB12.Q
SER5: OB10.DS OB11.Q
SER6: OB9.DS OB10.Q
SER7: OB8.DS OB9.Q
SER8: OB7.DS OB8.Q
SER9: OB6.DS OB7.Q
SER10: OB5.DS OB6.Q
SER11: OB4.DS OB5.Q
SER12: OB3.DS OB4.Q
SER13: OB2.DS OB3.Q
SER14: OB1.DS OB2.Q
pads on no net: S1.NC1 S1.NC2 S1.NC3 S2.NC1 S2.NC2 S2.NC3 S3.NC1 S3.NC2 S3.NC3 S4.NC1 S4.NC2 S4.NC3 S5.NC1 S5.NC2 S5.NC3 S6.NC1 S6.NC2 S6.NC3 S7.NC1 S7.NC2 S7.NC3 S8.NC1 S8.NC2 S8.NC3 ZIF.129 ZIF.130 ZIF.131 ZIF.132 ZIF.133 ZIF.134 ZIF.135 ZIF.136 ZIF.137 ZIF.138 ZIF.139 ZIF.140 ZIF.141 ZIF.142 ZIF.143 ZIF.144 ZIF.145 ZIF.146 ZIF.147 ZIF.148 ZIF.149 ZIF.150 ZIF.151 ZIF.152 ZIF.153 ZIF.154 ZIF.155 ZIF.156 ZIF.157 ZIF.158 ZIF.159 ZIF.160 ZIF.161 ZIF.162 ZIF.163 ZIF.164 ZIF.165 ZIF.166 ZIF.167 ZIF.168 ZIF.169

## Silkscreen, mask and mechanical layers (free items; w line width, h text height)
Mechanical 3:
  the board outline again, w10